# EAGLE board pH-meter-v1-3.job (EAGLE 6.1)
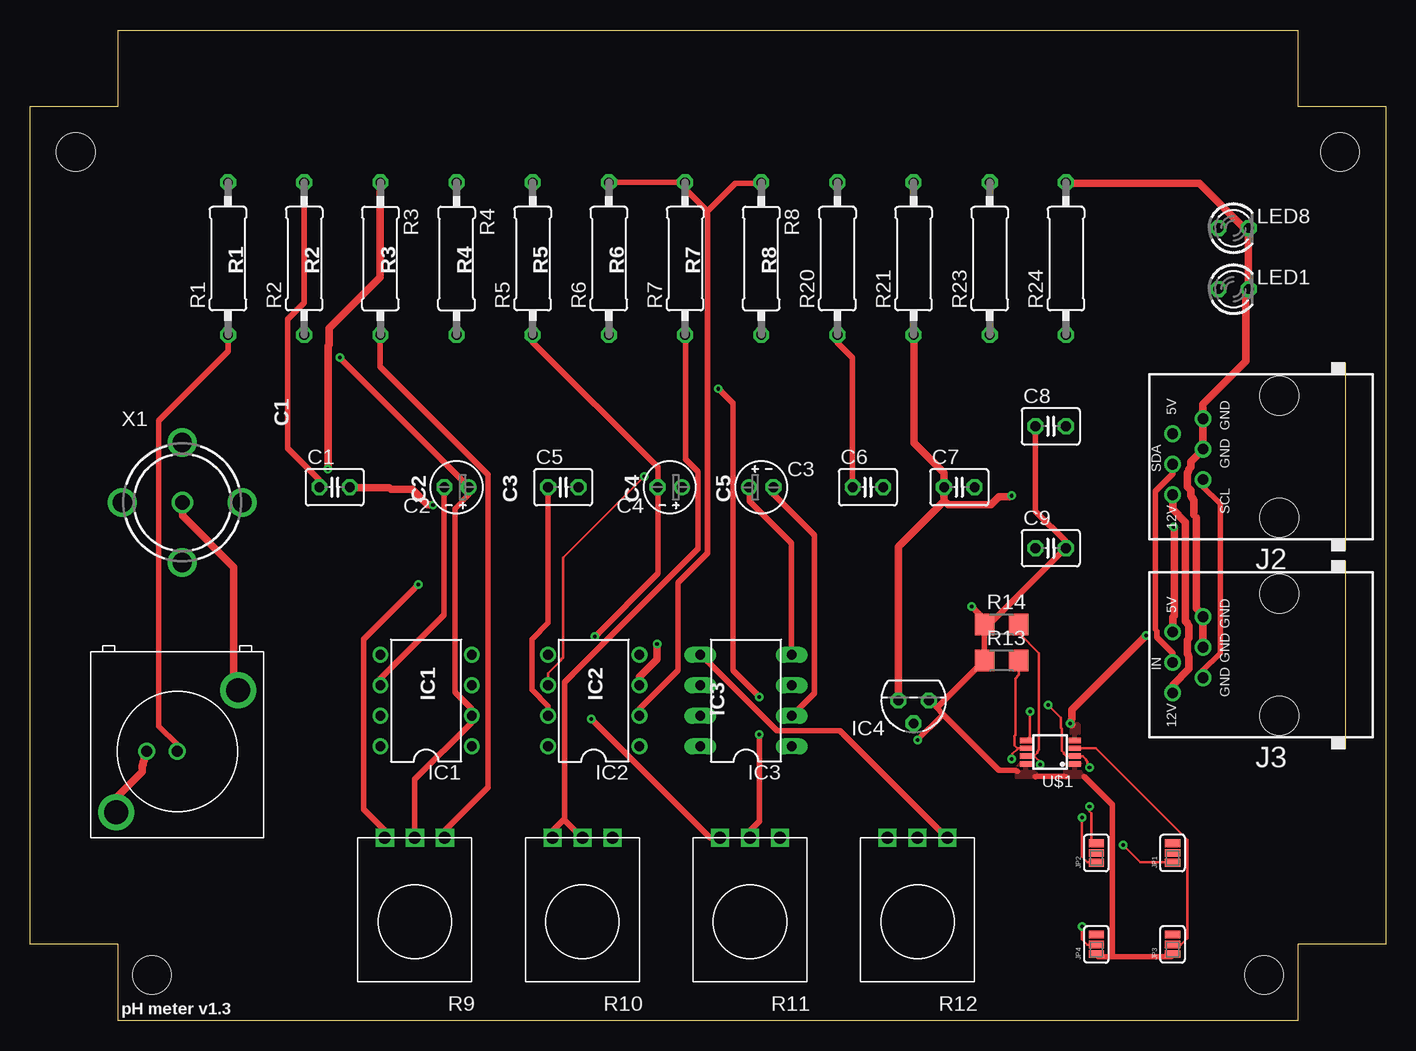
[diagram p0: board, top side]
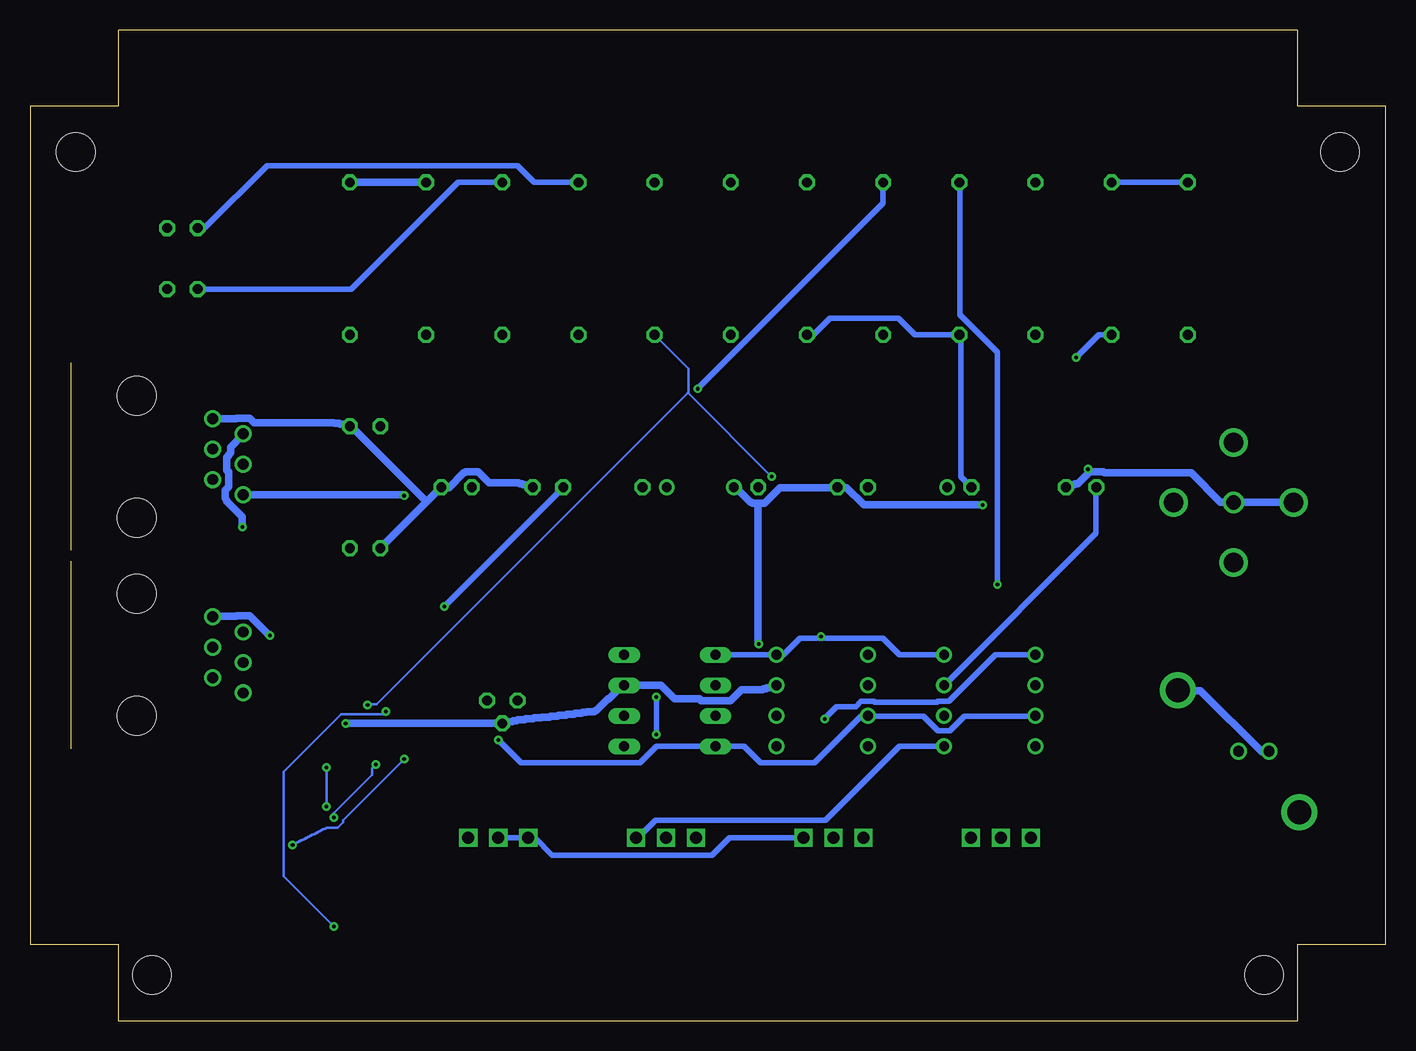
[diagram p1: board, bottom side, seen from below]

Size 113.03 x 82.55 mm. Coordinates in mm from the lower left corner, seen from the top.
Outline: 0,76.2 7.35,76.2 7.35,82.55 105.68,82.55 105.68,76.2 113.03,76.2 113.03,6.35 105.68,6.35 105.68,0 7.35,0 7.35,6.35 0,6.35 0,76.2
Copper layers (1*16): Top 0.035mm / dielectric 1.5mm / Bottom 0.035mm
Design rules: minimum track width 0.15mm, minimum drill 0.3mm, track to track 0.3mm, track to pad 0.3mm, pad to pad 0.3mm, via to via 0.3mm, smd to smd 0.3mm, copper to edge 1mm, drill to drill 0.3mm, minimum pad ring 10mil, minimum via ring 8mil, stop-mask expansion 4mil, vias tented up to drill 0mil, thermal gap 10mil
Net classes: 0 default: width 0.457 mm; 1 smd: width 0.203 mm; 2 highpower: width 0.61 mm
Holes 3.2 mm at 3.81,72.39 10.16,3.81 102.87,3.81 109.22,72.39
Milling: 12 lines

## Footprints (pad centres in the part's own frame; a part is rotated, then mirrored left to right if it is on the bottom)
C025-030X050 = drill 0.813 octagon: 1 -1.27,0; 2 1.27,0
E2-4 = drill 0.813 pad 1.27: + -1.016,0 | drill 0.813 pad 1.27 octagon: - 1.016,0
DIL08 = drill 0.813 pad 1.27: 1 -3.81,-3.81; 2 -1.27,-3.81; 3 1.27,-3.81; 4 3.81,-3.81; 5 3.81,3.81; 6 1.27,3.81; 7 -1.27,3.81; 8 -3.81,3.81
DIL08' = drill 0.813 long: 1 -3.81,-3.81; 2 -1.27,-3.81; 3 1.27,-3.81; 4 3.81,-3.81; 5 3.81,3.81; 6 1.27,3.81; 7 -1.27,3.81; 8 -3.81,3.81
TO92 = drill 0.813 octagon: 1 -1.27,0; 2 0,1.905; 3 1.27,0
RJ12-STRAIGHT-I2C = drill 0.9 pad 1.4: +5V 1.905,8.89; +12V -3.175,8.89; GND1 3.175,6.35; GND2 0.635,6.35; SCL -1.905,6.35; SDA -0.635,8.89 | hole 3.251: -5.08,0; 5.08,0
RJ12-STRAIGHT-ANALOG = drill 0.9 pad 1.4: +5V 1.905,8.89; +12V -3.175,8.89; GND1 3.175,6.35; GND2 0.635,6.35; GND3 -1.905,6.35; IN -0.635,8.89 | hole 3.251: -5.08,0; 5.08,0
SJ_3_PASTE1&2 = smd 0.635 x 1.27: 1 -0.813,0; 2 0,0; 3 0.813,0
LED3MM = drill 0.813 octagon: A -1.27,0; K 1.27,0
0309/12 = drill 0.813 octagon: 1 -6.35,0; 2 6.35,0
POT-METER_ALPS = drill 1 square: P$1 2.25,0; P$2 4.75,0; P$3 7.25,0
R1206 = smd 1.6 x 1.803: 1 -1.422,0; 2 1.422,0
MSOP8 = smd 0.45 x 1: 1 -0.975,-2.05; 2 -0.325,-2.05; 3 0.325,-2.05; 4 0.975,-2.05; 5 0.975,2.05; 6 0.325,2.05; 7 -0.325,2.05; 8 -0.975,2.05
BNC_VERTICAL_AMPHENOL = drill 0.9: GND 4.66,7.2; INPUT 7.2,7.2 | drill 2: GND_1 12.28,12.28; GND_2 2.12,2.12
BTOR1 = drill 1.6 pad 2.2: S -5,0; S@1 0,5; S@2 5,0; S@3 0,-5 | drill 1.2 pad 1.6: T 0,0

## Placement (x,y rotation side)
C1  2.2nF  [C025-030X050]  25.4,44.45 0 top
C2  1uF  [E2-4]  35.56,44.45 180 top
C3  10uF  [E2-4]  60.96,44.45 0 top
C4  10uF  [E2-4]  53.34,44.45 180 top
C5  0.1uF  [C025-030X050]  44.45,44.45 0 top
C6  0.1uF  [C025-030X050]  69.85,44.45 0 top
C7  0.33uF  [C025-030X050]  77.47,44.45 0 top
C8  0.1uF  [C025-030X050]  85.09,49.53 0 top
C9  0.1uF  [C025-030X050]  85.09,39.37 0 top
IC1  CA3140N  [DIL08]  33.02,26.67 90 top
IC2  TL081P  [DIL08]  46.99,26.67 90 top
IC3  ICL7660CPA  [DIL08']  59.69,26.67 90 top
IC4  7805L  [TO92]  73.66,26.67 180 top
J2  I2C  [RJ12-STRAIGHT-I2C]  104.14,46.99 90 top
J3  I2C  [RJ12-STRAIGHT-ANALOG]  104.14,30.48 90 top
JP1  JUMPER-3-OLD1-2  [SJ_3_PASTE1&2]  95.25,13.97 90 top
JP2  JUMPER-3-OLD1-2  [SJ_3_PASTE1&2]  88.9,13.97 90 top
JP3  A0  [SJ_3_PASTE1&2]  95.25,6.35 90 top
JP4  A1  [SJ_3_PASTE1&2]  88.9,6.35 90 top
LED1  [LED3MM]  100.33,60.96 0 top
LED8  [LED3MM]  100.33,66.04 0 top
R1  4M7  [0309/12]  16.51,63.5 90 top
R2  100M  [0309/12]  22.86,63.5 90 top
R3  1K  [0309/12]  29.21,63.5 270 top
R4  2K2  [0309/12]  35.56,63.5 270 top
R5  4K7  [0309/12]  41.91,63.5 90 top
R6  47K  [0309/12]  48.26,63.5 90 top
R7  56K  [0309/12]  54.61,63.5 90 top
R8  47K  [0309/12]  60.96,63.5 270 top
R9  4k7  [POT-METER_ALPS]  36.83,15.24 180 top
R10  47k  [POT-METER_ALPS]  50.8,15.24 180 top
R11  5k  [POT-METER_ALPS]  64.77,15.24 180 top
R12  50k  [POT-METER_ALPS]  78.74,15.24 180 top
R13  10K  [R1206]  81,30 0 top
R14  10K  [R1206]  81,33 0 top
R20  1K  [0309/12]  67.31,63.5 90 top
R21  1K  [0309/12]  73.66,63.5 90 top
R23  10K  [0309/12]  80.01,63.5 90 top
R24  10K  [0309/12]  86.36,63.5 90 top
U$1  ADS7823  [MSOP8]  85.06,22.37 90 top
U$2  BNC_IN  [BNC_VERTICAL_AMPHENOL]  5.08,15.24 0 top
X1  BTOR1  [BTOR1]  12.7,43.18 0 top

## Library data of the parts
C1-C9 = resistor
IC1 IC2 IC4 = linear
IC3 = maxim; MF: INTERSIL; MPN: ICL7660CPA; OC_FARNELL: 1018170; OC_NEWARK: 06F7441
J2 J3 LED1 LED8 R9-R12 U$1 U$2 = lpatiny
JP1-JP4 = SparkFun
R1-R8 R13 R14 R20 R21 R23 R24 = rcl
X1 = con-lumberg; MPN: BTOR 1; OC_FARNELL: 1217030; OC_NEWARK: 96K7172

## Nets
+5V: C5.1 C6.1 C8.1 C9.2 IC1.7 IC2.7 IC3.8 IC4.1 JP3.1 JP4.1 R13.1 R14.1 R20.1 U$1.1 U$1.8
+12V [highpower]: C7.1 IC4.3 J2.+12V J3.+12V R21.1
-5V: C4.- IC1.4 IC2.4 IC3.5 R5.1 R12.P$1
ASDF: R3.2 R9.P$1
DATA_OUT [smd]: IC2.6 JP2.3 R8.2 U$1.2
GND [highpower]: C1.2 C4.+ C5.2 C6.2 C7.2 C8.2 C9.1 IC2.3 IC3.3 IC4.2 J2.GND1 J2.GND2 J3.GND1 J3.GND2 LED1.K LED8.K R3.1 R23.2 R24.2 U$1.4 U$2.GND U$2.GND_1 U$2.GND_2 X1.S X1.T
N$1: C1.1 IC1.3 R1.2 R2.2
N$2: C2.+ IC1.2 R2.1 R9.P$2
N$3: R5.2 R11.P$2
N$4: IC1.5 R11.P$3
N$5: IC1.1 R11.P$1
N$6: C2.- IC1.6 R4.2 R6.1
N$7: R4.1 R9.P$3
N$8: R7.1 R10.P$2 R10.P$3
N$10: R10.P$1 R12.P$2 R12.P$3
N$11: C3.- IC3.2
N$12: IC2.2 R6.2 R7.2 R8.1
N$13: C3.+ IC3.4
N$14 [smd]: JP1.1 R13.2 U$1.6
N$15 [smd]: JP2.1 R14.2 U$1.7
N$18: JP3.3 R23.1
N$19: JP4.3 R24.1
N$20: LED8.A R20.2
N$21 [smd]: JP3.2 U$1.3
N$22 [smd]: JP4.2 U$1.5
N$23: LED1.A R21.2
PH_IN: R1.1 U$2.INPUT
RJ12-5V [highpower]: J2.+5V J3.+5V
SCL: J2.SCL J3.GND3 JP2.2
SDA: J2.SDA J3.IN JP1.2

## Tracks (layer width: path | path; a pad name or v marks a point on that pad's centre or on a via)
+5V  (via drill 0.3)
  Top 0.457: C5.1 43.2,44.42 43.2,33.15 41.83,31.77 41.83,27.58 43.2,26.21 43.2,25.45 IC2.7 | C6.1 68.58,44.5 68.58,55.24 67.28,56.54 67.28,57.15 R20.1 | C8.1 83.82,42.44 86.33,39.93 86.33,39.4 C9.2 86.18,39.24 80.01,33.07 79.78,33.07 R14.1 | 90.22,5.33 95.1,5.33 95.25,5.49 JP3.1 | 90.22,5.33 89.08,5.33 88.92,5.49 JP4.1 | R14.1 79.55,32.99 79.55,30.02 R13.1 79.4,29.87 75.74,26.21 75.59,26.06 | 83.82,20.32 83.97,20.34 86.18,20.34 86.36,20.32 | 75.59,26.06 74.98,26.67 IC4.1 | 75.59,26.06 76.12,25.53 | 76.12,25.53 80.77,20.88 82.14,20.88 82.3,20.76 | 90.22,5.33 90.22,5.49 90.22,17.98 88.01,20.19 87.88,20.32 | v78.49,34.52 79.55,33.45 79.55,33.22 R14.1 | v73.99,23.39 75.97,25.38 76.12,25.53
  Bottom 0.457: IC1.7 29.26,25.38 35.13,25.38 36.35,24.16 37.34,24.16 38.56,25.38 43.13,25.38 IC2.7 43.36,25.38 43.74,25.38 47.62,21.49 52.12,21.49 53.49,22.86 55.85,22.86 IC3.8 56.08,22.86 60.81,22.86 62.18,21.49 72.08,21.49 v73.99,23.39 | v78.49,34.52 68.58,44.42 C6.1
  pour Top: 82.3,21.34 83.82,21.34 83.82,20.32 82.3,20.32
  pour Top: 87.38,21.34 87.88,21.34 87.88,20.32 86.36,20.32 86.36,21.34
+12V  (via drill 0.3)
  Top 0.61: J2.+12V 95.25,42.6 96.32,41.53 96.32,33.3 96.47,33.15 96.47,33.07 96.62,32.92 96.62,31.85 96.47,31.7 96.47,30.56 96.55,30.48 96.55,30.4 96.62,30.33 96.62,29.34 95.25,27.96 95.25,27.36 J3.+12V | IC4.3 72.39,39.47 76.2,43.28 | 76.2,43.28 76.2,44.42 C7.1 76.2,44.73 76.2,45.64 73.69,48.16 73.69,57.15 R21.1 | v81.84,43.74 81.76,43.74 81.69,43.66 80.77,43.66 80.09,42.98 76.58,42.98 76.43,43.13 76.2,43.28
  Bottom 0.61: J2.+12V 81.92,43.81 v81.84,43.74
-5V  (via drill 0.3)
  Top 0.457: R5.1 41.91,56.54 52.35,46.1 52.35,44.5 C4.- 52.35,44.27 52.35,37.26 v47.09,32 | R12.P$1 76.43,15.24 67.51,24.16 62.26,24.16 55.93,30.48 IC3.5
  Bottom 0.457: 47.09,31.85 48.84,31.85 50.22,30.48 50.75,30.48 IC2.4 50.98,30.48 55.85,30.48 IC3.5 | 47.09,31.85 41.91,31.85 40.54,30.48 36.88,30.48 IC1.4 | v47.09,32 47.09,31.85
ASDF
  Top 0.457: R3.2 29.18,57.15 29.18,54.48 38.18,45.49 38.18,19.43 34.59,15.85 34.59,15.24 R9.P$1
DATA_OUT  (via drill 0.3)
  Top 0.203: v88.32,21.11 88.24,21.18 88.24,21.34 88.16,21.41 88.16,21.57 88.01,21.72 88.01,21.79 87.78,22.02 87.17,22.02 U$1.2 87.02,22.02 86.41,22.02 86.18,22.25 86.18,22.33 86.03,22.48 86.03,24.31 85.95,24.38 85.95,25.22 v84.89,26.29 | v88.32,17.83 88.32,17.45 88.47,17.3 88.47,15.16 88.85,14.78 JP2.3 | v51.21,45.34 44.42,38.56 44.42,30.25 44.27,30.1 44.27,30.02 43.2,28.96 43.2,27.96 IC2.6
  Bottom 0.203: v88.32,17.83 v88.32,21.11 | 58.14,52.27 v51.21,45.34 | 58.14,52.27 58.14,54.33 R8.2 | v84.89,26.29 84.81,26.36 84.12,26.36 58.22,52.27 58.14,52.27
GND  (via drill 0.3)
  Top 0.61: U$2.GND 9.68,22.4 9.6,22.33 9.6,21.95 9.53,21.87 9.53,21.64 9.45,21.57 9.45,21.34 9.37,21.26 9.37,20.73 7.16,18.52 7.16,17.37 U$2.GND_2 | v24.84,45.95 24.84,56.24 24.92,56.31 24.92,57.68 29.18,61.95 29.18,69.8 R3.1 | U$2.GND_1 17.3,27.58 17.22,27.66 17.22,28.04 17.14,28.12 17.14,28.35 17.07,28.42 17.07,28.65 16.99,28.73 16.99,37.8 12.72,42.06 12.72,43.13 X1.T | 86.87,24.64 v86.72,24.77 86.79,25.07 86.87,25.15 86.87,25.91 v93.04,32.08 | v52.27,31.39 52.27,30.1 50.83,28.65 50.83,27.96 IC2.3 | J3.GND2 97.77,31.17 97.77,33.6 J3.GND1 97.61,33.91 97.54,33.98 97.54,34.06 97.23,34.37 97.23,41.91 97,42.14 97,43.36 96.93,43.43 96.93,43.51 96.85,43.59 96.85,43.66 96.77,43.74 96.77,44.2 96.47,44.5 96.47,45.64 96.55,45.72 96.55,45.8 96.62,45.87 96.62,45.95 96.77,46.1 96.77,46.56 97.61,47.4 J2.GND2 97.77,47.62 97.77,50.14 J2.GND1 97.77,50.44 97.77,51.36 101.35,54.94 101.35,60.66 101.42,60.73 LED1.K 101.58,60.96 101.58,65.99 LED8.K 101.27,65.99 97.46,69.8 86.41,69.8 R24.2 | v33.6,42.98 33.15,42.98 31.85,44.27 30.1,44.27 29.95,44.42 26.67,44.42 C1.2
  Bottom 0.61: U$2.GND_1 17.3,27.51 15.47,27.51 10.36,22.4 9.75,22.4 U$2.GND | 24.69,45.72 25.68,44.73 25.91,44.73 25.98,44.65 26.14,44.65 26.21,44.58 26.59,44.58 26.67,44.5 C1.2 | 24.69,45.72 23.55,45.72 23.47,45.64 16.23,45.64 13.79,43.2 12.72,43.2 X1.T 12.42,43.2 7.77,43.2 X1.S | v24.84,45.95 24.69,45.72 | v86.72,24.77 73.69,24.77 IC4.2 73.38,24.84 73.3,24.92 72.85,24.92 72.77,24.99 72.47,24.99 72.39,25.07 71.78,25.07 71.7,25.15 71.09,25.15 71.02,25.22 70.41,25.22 70.33,25.3 69.72,25.3 69.65,25.38 69.04,25.38 68.96,25.45 68.35,25.45 68.28,25.53 67.67,25.53 67.59,25.6 67.06,25.6 66.98,25.68 66.67,25.68 66.6,25.76 65.99,25.76 65.91,25.83 65.84,25.83 64.85,26.82 64.77,26.82 63.78,27.81 IC3.3 63.48,27.96 60.43,27.96 59.28,26.82 57.23,26.82 57.07,26.67 54.63,26.67 53.72,27.58 51.97,27.58 51.89,27.66 51.66,27.66 51.59,27.74 51.36,27.74 51.28,27.81 50.9,27.81 50.83,27.89 IC2.3 | 52.35,43.13 52.81,43.13 52.88,43.2 52.96,43.2 54.18,44.42 54.33,44.42 C4.+ | 52.35,43.13 51.82,43.13 50.52,44.42 45.72,44.42 C5.2 45.49,44.42 44.96,44.42 43.51,42.98 v33.6,42.98 | v52.27,31.39 52.35,31.47 52.35,42.9 52.35,43.13 | C6.2 71.17,44.5 71.25,44.58 71.63,44.58 71.7,44.65 71.93,44.65 72.01,44.73 72.24,44.73 72.31,44.81 74.75,44.81 75.67,45.72 76.73,45.72 76.81,45.64 76.89,45.64 78.11,44.42 78.72,44.42 C7.2 78.94,44.27 79.97,43.24 | 79.97,43.24 83.82,39.4 C9.1 | 79.97,43.24 80.16,43.43 86.26,49.53 86.33,49.53 C8.2 86.64,49.61 86.72,49.68 87.17,49.68 87.25,49.76 87.63,49.76 87.71,49.84 94.34,49.84 94.72,50.22 95.78,50.22 95.86,50.14 97.77,50.14 J2.GND1
  Bottom 0.61: R23.2 80.01,69.88 86.33,69.88 R24.2 | v93.04,32.08 94.72,33.76 95.78,33.76 95.86,33.68 97.77,33.68 J3.GND1
  pour Top: 87.38,23.37 87.38,24.64 86.87,24.64 86.87,23.37
N$1
  Top 0.457: R2.2 22.86,69.8 22.86,59.82 21.49,58.45 21.49,47.7 24.16,45.03 24.16,44.5 C1.1
  Bottom 0.457: R1.2 16.54,69.88 22.86,69.88 R2.2 | IC1.3 36.8,27.96 24.16,40.62 24.16,44.42 C1.1
N$2  (via drill 0.3)
  Top 0.457: R9.P$2 32.08,20.12 36.8,24.84 36.8,25.38 IC1.2 36.8,25.6 36.8,25.98 35.43,27.36 35.43,42.67 36.58,43.81 36.58,44.27 C2.+ 36.58,44.5 v25.83,55.24 | R9.P$2
  Bottom 0.457: v25.83,55.24 23.93,57.15 R2.1
N$3  (via drill 0.3)
  Top 0.457: v57.38,52.65 58.6,51.44 58.6,29.18 v60.81,26.98 | v60.81,23.85 60.81,16.61 60.05,15.85 60.05,15.24 R11.P$2
  Bottom 0.457: v57.38,52.65 41.91,68.12 41.91,69.8 R5.2 | v60.81,23.85 v60.81,26.98
N$4  (via drill 0.3)
  Top 0.457: v46.79,25.15 56.69,15.24 57.45,15.24 R11.P$3
  Bottom 0.457: v46.79,25.15 45.8,26.14 44.2,26.14 43.74,26.59 42.67,26.59 42.6,26.52 37.41,26.52 37.34,26.59 36.42,26.59 32.54,30.48 29.26,30.48 IC1.5
N$5
  Bottom 0.457: IC1.1 36.88,22.86 40.54,22.86 46.71,16.69 60.88,16.69 62.33,15.24 62.48,15.24 R11.P$1
N$6
  Top 0.457: IC1.6 29.18,27.96 29.18,28.5 34.52,33.83 34.52,44.42 C2.-
  Bottom 0.457: R6.1 48.23,57.15 47.7,57.15 46.33,58.52 40.62,58.52 39.24,57.15 35.59,57.15 R4.2 35.43,57 35.43,45.34 34.59,44.5 C2.-
N$7  (via drill 0.3)
  Top 0.457: v32.38,36.35 27.81,31.77 27.81,17.6 29.57,15.85 29.57,15.24 R9.P$3
  Bottom 0.457: v32.38,36.35 32.38,55.7 35.51,58.83 35.51,69.8 R4.1
N$8
  Top 0.457: 44.5,16.76 43.59,15.85 43.59,15.24 R10.P$3 | 44.5,16.76 44.58,16.84 44.58,28.19 55.7,39.32 55.7,45.72 54.63,46.79 54.63,57.15 R7.1 | R10.P$2 46.02,15.24 44.65,16.61 44.5,16.76
N$10
  Bottom 0.457: R10.P$1 48.62,15.24 54.71,15.24 56.16,13.79 69.49,13.79 70.94,15.24 71.48,15.24 R12.P$3 71.7,15.24 73.91,15.24 R12.P$2
N$11
  Top 0.457: IC3.2 63.55,25.45 65.38,27.28 65.38,40.46 61.95,43.89 61.95,44.42 C3.-
N$12
  Top 0.457: 56.46,67.44 56.46,38.94 54.03,36.5 54.03,29.18 50.83,25.98 50.83,25.45 IC2.2 | 56.46,67.44 54.63,69.27 54.63,69.8 R7.2 54.41,69.88 48.31,69.88 R6.2 | R8.1 60.96,69.8 58.83,69.8 56.62,67.59 56.46,67.44
N$13
  Top 0.457: IC3.4 63.48,30.48 63.48,39.78 59.97,43.28 59.97,44.42 C3.+
N$14  (via drill 0.3)
  Top 0.203: 82.3,22.71 82.98,22.71 U$1.6 | 82.3,22.71 82.07,22.94 82.07,23.7 82.14,23.77 82.14,28.5 82.45,28.8 82.45,29.95 R13.2 | v91.14,14.63 92.58,13.18 95.25,13.18 JP1.1 | v81.84,21.79 81.92,21.87 81.92,22.25 82.3,22.63 82.3,22.71
  Bottom 0.203: v91.14,14.63 91.06,14.71 90.98,14.71 90.91,14.78 90.83,14.78 90.75,14.86 90.68,14.86 90.6,14.94 90.53,14.94 90.45,15.01 90.37,15.01 90.3,15.09 90.22,15.09 90.14,15.16 90.07,15.16 89.99,15.24 89.92,15.24 89.84,15.32 89.76,15.32 89.69,15.39 89.61,15.39 89.53,15.47 89.46,15.47 89.38,15.54 89.31,15.54 89.23,15.62 89.15,15.62 89.08,15.7 89,15.7 88.92,15.77 88.85,15.77 88.77,15.85 88.7,15.85 88.62,15.93 88.54,15.93 88.47,16 88.39,16 88.32,16.08 87.4,16.08 86.94,16.54 86.94,16.69 v81.84,21.79
N$15  (via drill 0.3)
  Top 0.203: 83.67,22.02 83.06,22.02 U$1.7 | 83.67,22.02 83.97,22.33 83.97,22.4 84.12,22.55 84.12,30.63 82.45,32.31 82.45,32.99 R14.2 | v87.71,16.92 87.71,13.72 87.86,13.56 87.86,13.49 88.16,13.18 88.85,13.18 JP2.1 | v84.2,21.34 84.12,21.41 84.12,21.64 83.74,22.02 83.67,22.02
  Bottom 0.203: v87.71,16.92 87.71,17.3 84.51,20.5 84.51,21.03 v84.2,21.34
N$20
  Bottom 0.457: R20.2 67.36,69.88 71.02,69.88 72.39,71.25 93.27,71.25 98.45,66.06 99.06,66.06 LED8.A
N$21
  Top 0.203: U$1.3 87.17,22.71 88.85,22.71 96.47,15.09 96.47,6.86 95.94,6.33 95.25,6.33 JP3.2
N$22  (via drill 0.3)
  Top 0.203: v83.36,25.76 83.36,23.7 83.06,23.39 U$1.5 | v87.71,7.85 87.71,6.78 88.16,6.33 88.85,6.33 JP4.2
  Bottom 0.203: v83.36,25.76 83.59,25.53 87.1,25.53 91.9,20.73 91.9,12.04 v87.71,7.85
N$23
  Bottom 0.457: LED1.A 86.26,60.96 77.34,69.88 73.69,69.88 R21.2
PH_IN
  Top 0.457: R1.1 16.54,57.15 16.54,55.78 10.74,49.99 10.74,24.54 12.27,23.01 12.27,22.48 U$2.INPUT
RJ12-5V  (via drill 0.3)
  Top 0.61: J3.+5V 95.25,33.6 95.4,33.76 95.4,41.07 v95.33,41.15
  Bottom 0.61: v95.33,41.15 95.33,41.99 96.62,43.28 96.62,43.36 96.77,43.51 96.77,44.2 96.47,44.5 96.47,45.72 96.62,45.87 96.62,46.94 96.47,47.09 96.47,47.17 96.32,47.32 96.32,47.78 95.25,48.84 J2.+5V
SCL
  Top 0.457: J3.GND3 97.77,28.57 97.77,29.18 99.21,30.63 99.21,43.05 97.77,44.5 97.77,45.03 J2.SCL
SDA
  Top 0.457: J3.IN 95.25,29.87 95.25,30.63 93.95,31.93 93.95,32.46 93.8,32.61 93.8,44.12 95.25,45.57 95.25,46.33 J2.SDA

## Text on the board
tPlace: R1 | R2 | R3 | R4 | R5 | R6 | R7 | R8 | C1 | C2 | C3 | C4 | C5 | IC1 | IC2 | IC3 | pH meter v1.3